# Altium PCB PCB1.PcbDoc
Units mm, origin at the board's own origin, x right, y up, seen from the top; angles counter-clockwise.
Board outline 110 x 60 mm, 2 copper layers (Top Layer, Bottom Layer); 35 components, 33 nets, 213 pads, 0 vias.
Unrouted connection lines stored in the file: 2.
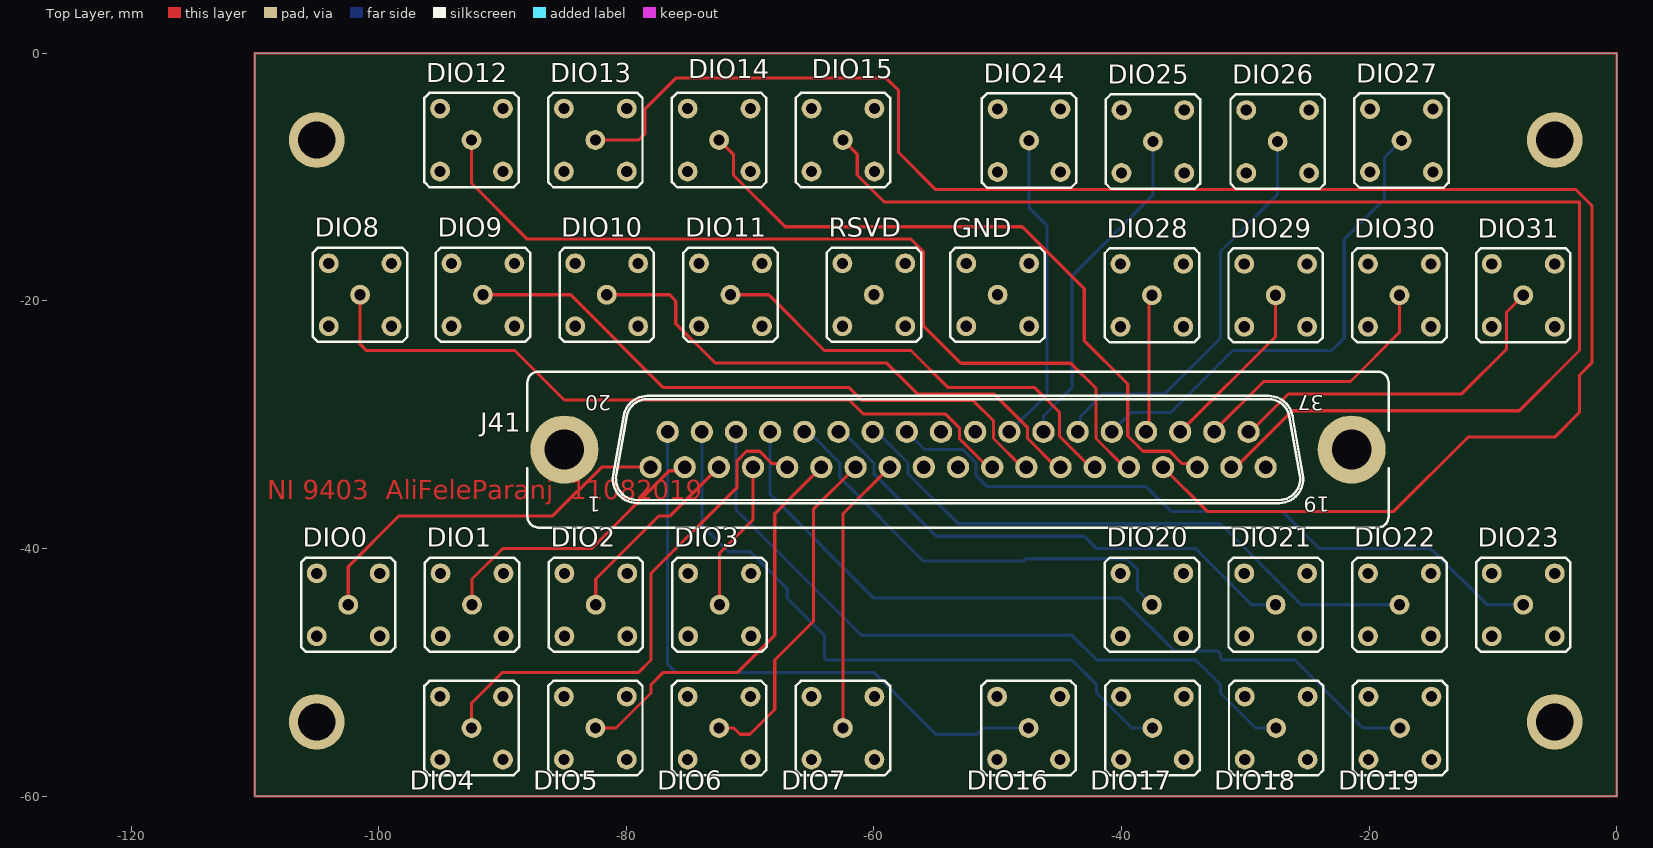
[diagram p0: Top Layer view]
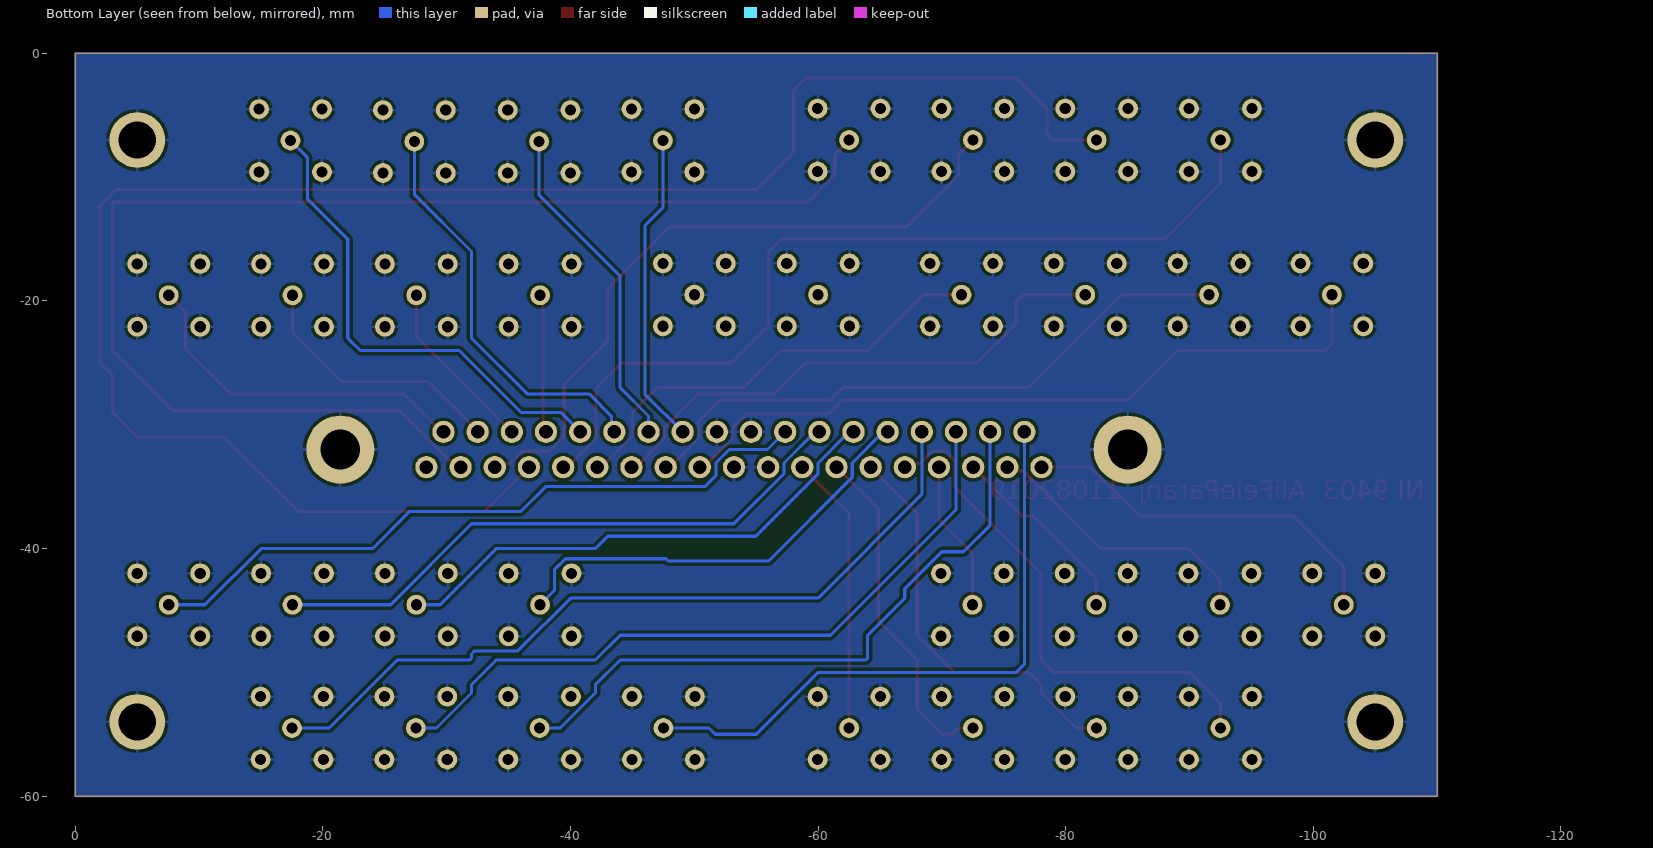
[diagram p1: Bottom Layer view, seen from below]
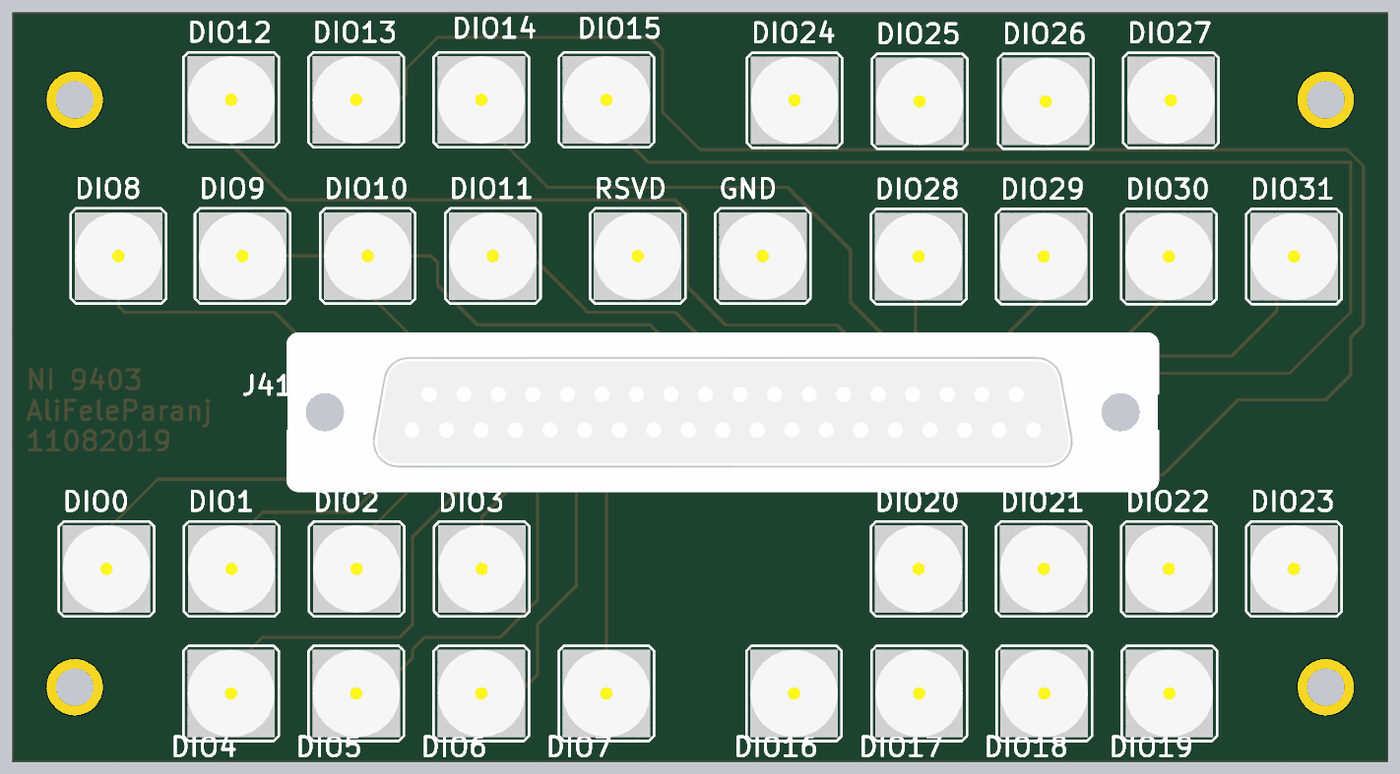
[diagram p2: 3D render of the assembled board from above, using the file's embedded part models]

## Layer stack, top to bottom
Top Solder: solder mask 0.0102, Solder Resist, Dk 3.5
Top Layer: signal copper 0.0356
Dielectric 1: dielectric 0.32, FR-4, Dk 4.8
Bottom Layer: signal copper 0.0356
Bottom Solder: solder mask 0.0102, Solder Resist, Dk 3.5

## Board outline
-110,-60 0,-60 0,-44 0,-14 0,0 -110,0

## Design rules (kind name [scope] priority, off if disabled: settings)
Clearance [All] p1: gap=0.254 ignorepadtopadclearanceinfootprint=FALSE except(0: Arc-Hole Track-Hole SMDPad-Hole THPad-Hole Via-Hole Fill-Hole Poly-Hole Region-Hole Text-Hole)
PolygonConnect [All] p1: connectstyle=Relief reliefconductorwidth=0.254 reliefentries=4 polygonreliefangle="90 Angle" airgapwidth=0.254
RoutingLayers "Schematic Routing Layers" [InNet('GND')] p1: top layer_v5=FALSE bottom layer_v5=TRUE
RoutingLayers [All] p2: top layer_v5=TRUE bottom layer_v5=TRUE
RoutingVias [All] p1: holewidth=0.711 width=1.27 viastyle="Through Hole" minholewidth=0.711 minwidth=1.27 maxholewidth=0.711 maxwidth=1.27
SolderMaskExpansion [All] p1: expansion=0.102
Width [All] p1: maxlimit=0.254 minlimit=0.254 preferedwidth=0.254
29 further rules are at their usual default settings.

## Components (designator, comment, footprint, x,y, rotation, side; value= is the part's Value field where it differs from the comment)
DIO0 "LEMO 00" LEMO_EPA.00.250.NTN -102.46,-44.54 r0 top
DIO1 "LEMO 00" LEMO_EPA.00.250.NTN -92.46,-44.54 r0 top
DIO2 "LEMO 00" LEMO_EPA.00.250.NTN -82.46,-44.54 r0 top
DIO3 "LEMO 00" LEMO_EPA.00.250.NTN -72.46,-44.54 r0 top
DIO4 "LEMO 00" LEMO_EPA.00.250.NTN -92.5,-54.5 r0 top
DIO5 "LEMO 00" LEMO_EPA.00.250.NTN -82.5,-54.5 r0 top
DIO6 "LEMO 00" LEMO_EPA.00.250.NTN -72.5,-54.5 r0 top
DIO7 "LEMO 00" LEMO_EPA.00.250.NTN -62.5,-54.5 r0 top
DIO8 "LEMO 00" LEMO_EPA.00.250.NTN -101.5,-19.5 r0 top
DIO9 "LEMO 00" LEMO_EPA.00.250.NTN -91.58,-19.5 r0 top
DIO10 "LEMO 00" LEMO_EPA.00.250.NTN -81.58,-19.5 r0 top
DIO11 "LEMO 00" LEMO_EPA.00.250.NTN -71.58,-19.5 r0 top
DIO12 "LEMO 00" LEMO_EPA.00.250.NTN -92.5,-7 r0 top
DIO13 "LEMO 00" LEMO_EPA.00.250.NTN -82.5,-7 r0 top
DIO14 "LEMO 00" LEMO_EPA.00.250.NTN -72.5,-7 r0 top
DIO15 "LEMO 00" LEMO_EPA.00.250.NTN -62.5,-7 r0 top
DIO16 "LEMO 00" LEMO_EPA.00.250.NTN -47.5,-54.5 r0 top
DIO17 "LEMO 00" LEMO_EPA.00.250.NTN -37.5,-54.5 r0 top
DIO18 "LEMO 00" LEMO_EPA.00.250.NTN -27.5,-54.5 r0 top
DIO19 "LEMO 00" LEMO_EPA.00.250.NTN -17.5,-54.5 r0 top
DIO20 "LEMO 00" LEMO_EPA.00.250.NTN -37.54,-44.54 r0 top
DIO21 "LEMO 00" LEMO_EPA.00.250.NTN -27.54,-44.54 r0 top
DIO22 "LEMO 00" LEMO_EPA.00.250.NTN -17.54,-44.54 r0 top
DIO23 "LEMO 00" LEMO_EPA.00.250.NTN -7.54,-44.54 r0 top
DIO24 "LEMO 00" LEMO_EPA.00.250.NTN -47.46,-7.04 r0 top
DIO25 "LEMO 00" LEMO_EPA.00.250.NTN -37.46,-7.12 r0 top
DIO26 "LEMO 00" LEMO_EPA.00.250.NTN -27.38,-7.12 r0 top
DIO27 "LEMO 00" LEMO_EPA.00.250.NTN -17.38,-7.04 r0 top
DIO28 "LEMO 00" LEMO_EPA.00.250.NTN -37.54,-19.54 r0 top
DIO29 "LEMO 00" LEMO_EPA.00.250.NTN -27.54,-19.54 r0 top
DIO30 "LEMO 00" LEMO_EPA.00.250.NTN -17.54,-19.54 r0 top
DIO31 "LEMO 00" LEMO_EPA.00.250.NTN -7.54,-19.54 r0 top
GND "LEMO 00" LEMO_EPA.00.250.NTN -50,-19.5 r0 top
J41 "D-SUB37F" NORCOMP_172-037-242R011 -53.199,-32 r180 top
RSVD "LEMO 00" LEMO_EPA.00.250.NTN -60,-19.5 r0 top

## Footprints (in the part's own frame and the unit in brackets; to place one, negate y for a bottom-side part, rotate by r counter-clockwise, add the part's x,y. Pads: shape width x height; smd on the part's side, far side on the other; paste and mask are expansions set on the pad)
LEMO_EPA.00.250.NTN [mm] "50 Ohm size 00 Coaxial Straight socket"
  round 1.6 hole 0.9: 1(0,0) 2(-2.54,-2.54) 2(-2.54,2.54) 2(2.54,-2.54) 2(2.54,2.54)
  silkscreen extent -3.81,-3.81 3.81,3.81, body extent -3.5,-3.5 3.5,3.5, height 14
NORCOMP_172-037-242R011 [mm] "Straight Wire Wrap D-Sub 37 Contacts Female Connector"
  round 1.8 hole 1.1: 1(24.842,1.422) 2(22.082,1.422) 3(19.322,1.422) 4(16.561,1.422) 5(13.801,1.422) 6(11.041,1.422) 7(8.281,1.422) 8(5.52,1.422) 9(2.76,1.422) 10(0,1.422) 11(-2.76,1.422) 12(-5.52,1.422) 13(-8.281,1.422) 14(-11.041,1.422) 15(-13.801,1.422) 16(-16.561,1.422) 17(-19.322,1.422) 18(-22.082,1.422) 19(-24.842,1.422) 20(23.458,-1.422) 21(20.697,-1.422) 22(17.937,-1.422) 23(15.177,-1.422) 24(12.417,-1.422) 25(9.657,-1.422) 26(6.896,-1.422) 27(4.136,-1.422) 28(1.376,-1.422) 29(-1.384,-1.422) 30(-4.145,-1.422) 31(-6.905,-1.422) 32(-9.665,-1.422) 33(-12.425,-1.422) 34(-15.185,-1.422) 35(-17.946,-1.422) 36(-20.706,-1.422) 37(-23.466,-1.422)
  round 5.5 hole 3.2: 38(-31.8,0) 39(31.801,0)
  silkscreen extent -34.79,-6.3 34.79,6.3, body extent -34.78,-6.3 34.79,6.3, height 11.93

## Part data
DIO0 DIO1 DIO2 DIO3 DIO4 DIO5 DIO6 DIO7 DIO8 DIO9 DIO10 DIO11 DIO12 DIO13 DIO14 DIO15 DIO16 DIO17 DIO18 DIO19 DIO20 DIO21 DIO22 DIO23 DIO24 DIO25 DIO26 DIO27 DIO28 DIO29 DIO30 DIO31 GND RSVD: library part LEMO_EPA.00.250.NTN, Manufacturer=LEMO, Manufacturer Part Number=EPA.00.250.NTN, Author="CERN DEM JLC", ComponentHeight=14mm, Component Type=Standard, CreateDate=22/04/2008, Family="LEMO 00", HelpURL=\\cern.ch\dfs\Applications\Altium\Datasheets\LEMO_EPA.00.250.NTN.pdf, LatestRevisionDate=22/04/2008, Mounted=Yes, Part Description="Size 00, 50 Ohms Coaxial Straight socket", Part Number=LEMO_EPA.00.250.NTN, Pin Count=2, PressFit=No, SCEM=09.46.11.184.2, Sense=No, SMD=No, Socket=No, Status=None
J41: library part NORCOMP_172-037-242R011, "Connector D-sub 37 Female", Manufacturer=NORCOMP, Manufacturer Part Number=172-037-242R011, Author="CERN DEM MR", ComponentHeight=12.08mm, Component Type=Standard, CreateDate=24/03/2016, Family=D-SUB37F, HelpURL=\\cern.ch\dfs\Applications\Altium\Datasheets\NORCOMP_172-037-242R011.pdf, LatestRevisionDate=24/03/2016, Mounted=Yes, Part Description="Straight Wire Wrap D-Sub 37 Contacts Female Connector With 0.065\"Clinch Nut (Board Side)", Part Number=NORCOMP_172-037-242R011, Pin Count=39, PressFit=No, Sense=No, SMD=No, Socket=No, Status=None

## Free pads (board coordinates)
  round 4.5 hole 3: 12(-105,-54) 12(-105,-7) 12(-5,-54) 12(-5,-7)

## Nets (pads, with @x,y where several pads share a name; then routed paths per layer and width w, separated by ;. In a path a pad name is that pad's centre, name@x,y a point inside that pad or via, vN(x,y) a via of type N, cw(c..) or ccw(c..) an arc to the next point about the centre after c; other vN are vias at no path point)
DIO0: DIO0.1 J41.1 | length 30.8
  Top Layer w0.254: DIO0.1 -102.46,-41.46 -98.359,-37.359 -85.931,-37.359 -81.994,-33.422 J41.1
DIO1: DIO1.1 J41.2 | length 23
  Top Layer w0.254: DIO1.1 -92.46,-42.46 -90,-40 -82.807,-40 -76.525,-33.718 -75.576,-33.718 J41.2
DIO2: DIO2.1 J41.3 | length 15.8
  Top Layer w0.254: DIO2.1 -82.46,-42.46 -77.359,-37.359 -76.457,-37.359 J41.3
DIO3: DIO3.1 J41.4 | length 12.2
  Top Layer w0.254: DIO3.1 -72.46,-40.358 -69.76,-37.658 J41.4
DIO4: DIO4.1 J41.5 | length 41.8
  Top Layer w0.254: DIO4.1 -92.5,-52.5 -90,-50 -79,-50 -78,-49 -78,-42 -71.041,-35.041 -71.041,-32.892 -70.291,-32.141 -69.229,-32.141 -68.244,-33.127 -67.296,-33.127 J41.5
DIO5: DIO5.1 J41.6 | length 33.1
  Top Layer w0.254: DIO5.1 -80.83,-54.5 -78,-51.67 -78,-51 -77,-50 -71,-50 -68,-47 -68,-37.183 J41.6
DIO6: DIO6.1 J41.7 | length 27.8
  Top Layer w0.254: DIO6.1 -71.318,-54.5 -70.818,-55 -70,-55 -68,-53 -68,-49 -64.888,-45.888 -64.888,-36.831 J41.7
DIO7: DIO7.1 J41.8 | length 22.6
  Top Layer w0.254: DIO7.1 -62.5,-37.203 J41.8
DIO8: DIO8.1 J41.11 | length 59.7
  Top Layer w0.254: DIO8.1 -101.5,-23.5 -101,-24 -89,-24 -85,-28 -62,-28 -60.877,-29.123 -54.218,-29.123 -53.095,-30.245 -53.095,-31.108 -50.781,-33.422 J41.11
DIO9: DIO9.1 J41.12 | length 50.5
  Top Layer w0.254: DIO9.1 -84.5,-19.5 -77,-27 -62,-27 -60.984,-28.016 -52,-28.016 -50.335,-29.681 -50.335,-31.108 -48.021,-33.422 J41.12
DIO10: DIO10.1 J41.13 | length 44
  Top Layer w0.254: DIO10.1 -76.5,-19.5 -76,-20 -76,-21.83 -72.83,-25 -59,-25 -56.492,-27.508 -50.312,-27.508 -47.575,-30.245 -47.575,-31.108 -45.261,-33.422 J41.13
DIO11: DIO11.1 J41.14 | length 36.3
  Top Layer w0.254: DIO11.1 -68.5,-19.5 -64,-24 -57,-24 -54,-27 -47,-27 -45,-29 -45,-30.923 -42.501,-33.422 J41.14
DIO12: DIO12.1 J41.15 | length 72
  Top Layer w0.254: DIO12.1 -92.5,-10.5 -88,-15 -57,-15 -56,-16 -56,-22 -52.973,-25.027 -44.082,-25.027 -42.055,-27.055 -42.055,-31.108 -39.74,-33.422 J41.15
DIO13: DIO13.1 J41.16 | length 146.5
  Top Layer w0.254: DIO13.1 -79,-7 -78.5,-6.5 -78.5,-4.5 -76,-2 -59,-2 -58,-3 -58,-8 -55,-11 -3.282,-11 -2,-12.282 -2,-25 -3,-26 -3,-29 -5,-31 -12,-31 -18,-37 -33.06,-37 J41.16
DIO14: DIO14.1 J41.17 | length 55.5
  Top Layer w0.254: DIO14.1 -71.346,-8.154 -71.346,-9.824 -67.17,-14 -48,-14 -43,-19 -43,-23.201 -39.493,-26.709 -39.493,-30.91 -38.261,-32.141 -36.107,-32.141 -35.122,-33.127 -34.173,-33.127 J41.17
DIO15: DIO15.1 J41.18 | length 106.6
  Top Layer w0.254: DIO15.1 -61.346,-8.154 -61.346,-9.824 -59.17,-12 -3,-12 -3,-24 -7.869,-28.869 -26.213,-28.869 -30.766,-33.422 J41.18
DIO16: DIO16.1 J41.20 | length 50.5
  Bottom Layer w0.254: J41.20 -76.656,-49.344 -76,-50 -60,-50 -55,-55 -51.682,-55 -51.182,-54.5 DIO16.1
DIO17: DIO17.1 J41.21 | length 52.6
  Bottom Layer w0.254: J41.21 -73.896,-38.104 -71.745,-40.255 -69.994,-40.255 -67,-43.25 -67,-44 -64,-47 -64,-48.851 -63.851,-49 -44,-49 -42,-51 -42,-51.67 -39.17,-54.5 DIO17.1
DIO18: DIO18.1 J41.22 | length 57.6
  Bottom Layer w0.254: J41.22 -71.136,-36.864 -61,-47 -44,-47 -42,-49 -34,-49 -32,-51 -32,-51.67 -29.17,-54.5 DIO18.1
DIO19: DIO19.1 J41.23 | length 63.9
  Bottom Layer w0.254: J41.23 -68.376,-35.624 -60,-44 -40,-44 -35.739,-48.261 -32.261,-48.261 -32,-48.522 -32,-48.851 -31.851,-49 -26,-49 -20.5,-54.5 DIO19.1
DIO20: DIO20.1 J41.24 | length 35.7
  Bottom Layer w0.254: J41.24 -65.273,-30.578 -62.76,-33.09 -62.76,-34.24 -56,-41 -47.886,-41 -47.705,-40.819 -39.591,-40.819 -38.694,-41.716 -38.694,-43.386 DIO20.1
DIO21: DIO21.1 J41.25 | length 41.6
  Bottom Layer w0.254: J41.25 -62.513,-30.578 -60,-33.09 -60,-33.953 -54.953,-39 -43,-39 -42,-40 -34,-40 -29.46,-44.54 DIO21.1
DIO22: DIO22.1 J41.26 | length 48.8
  Bottom Layer w0.254: J41.26 -59.752,-30.578 -57.24,-33.09 -57.24,-33.953 -53.193,-38 -32,-38 -25.46,-44.54 DIO22.1
DIO23: DIO23.1 J41.27 | length 56.2
  Bottom Layer w0.254: J41.27 -55.913,-32 -52.81,-32 -51.76,-33.05 -51.76,-34.092 -50.851,-35 -38,-35 -36,-37 -27,-37 -24,-40 -15,-40 -10.46,-44.54 DIO23.1
DIO24: DIO24.1 J41.30 | length 25.4
  Bottom Layer w0.254: J41.30 -46,-27.523 -46,-13.932 -47.46,-12.472 DIO24.1
DIO25: DIO25.1 J41.31 | length 27.1
  Bottom Layer w0.254: J41.31 -46.294,-29.294 -44,-27 -44,-18 -37.46,-11.46 DIO25.1
DIO26: DIO26.1 J41.32 | length 33.1
  Bottom Layer w0.254: J41.32 -43.297,-30.34 -43.297,-29.297 -41.5,-27.5 -36.5,-27.5 -32,-23 -32,-16 -27.38,-11.38 DIO26.1
DIO27: DIO27.1 J41.33 | length 39.8
  Bottom Layer w0.254: J41.33 -39.196,-29 -36,-29 -31,-24 -23,-24 -22,-23 -22,-15 -18.739,-11.739 -18.739,-8.399 DIO27.1
DIO28: DIO28.1 J41.34 | length 11.2
  Top Layer w0.254: J41.34 -37.777,-30.341 -37.777,-19.777 DIO28.1
DIO29: DIO29.1 J41.35 | length 14.2
  Top Layer w0.254: J41.35 -27.54,-22.864 DIO29.1
DIO30: DIO30.1 J41.36 | length 21.3
  Top Layer w0.254: J41.36 -32.493,-30.493 -28.5,-26.5 -21.5,-26.5 -17.54,-22.54 DIO30.1
DIO31: DIO31.1 J41.37 | length 28.5
  Top Layer w0.254: J41.37 -29.578,-30.578 -26.5,-27.5 -12.5,-27.5 -8.899,-23.899 -8.899,-20.899 DIO31.1
GND: DIO0.2 DIO1.2 DIO2.2 DIO3.2 DIO4.2 DIO5.2 DIO6.2 DIO7.2 DIO8.2 DIO9.2 DIO10.2 DIO11.2 DIO12.2 DIO13.2 DIO14.2 DIO15.2 DIO16.2 DIO17.2 DIO18.2 DIO19.2 DIO20.2 DIO21.2 DIO22.2 DIO23.2 DIO24.2 DIO25.2 DIO26.2 DIO27.2 DIO28.2 DIO29.2 DIO30.2 DIO31.2 GND.1 GND.2 J41.9 J41.10 J41.28 J41.29 J41.38 J41.39 pad.12 RSVD.2
pads on no net: J41.19 RSVD.1
copper on no net: | length 340
  Top Layer w0.2: -110,-60 -110,0 0,0 0,-14 0,-44 0,-60 -110,-60

## Polygon pours and split planes (outlines as drawn)
GND on Bottom Layer "gnd" (solid, remove dead copper, pour order 48): 0,0 -110,0 -110,-60 0,-60
GND on Bottom Layer "Bottom Layer-GND 1" (solid, pour order 32): -120,-19
GND on Bottom Layer "Bottom Layer-GND 2" (solid, pour order 18): -113.25,-1.25

## Other copper
Top Layer:
  text "NI 9403  AliFeleParanj  11082019" at -109,-36 h1.52
Bottom Layer:
  region net GND: -124.5,-58.625

## Text inside footprints (layer, text, board x,y; h text height)
J41: Top Overlay "20" at -81.229,-27.6 h1.2 r180; Top Overlay "19" at -23.168,-35.8 h1.2 r180; Top Overlay "37" at -23.668,-27.6 h1.2 r180; Top Overlay "1" at -82.079,-35.8 h1.2 r180; Mechanical 14 "1" at -82.079,-35.8 h1.2 r180; Mechanical 14 "37" at -23.668,-27.6 h1.2 r180; Mechanical 14 "19" at -23.168,-35.8 h1.2 r180; Mechanical 14 "20" at -81.229,-27.6 h1.2 r180